# EAGLE board main1 (EAGLE 7.5.0)
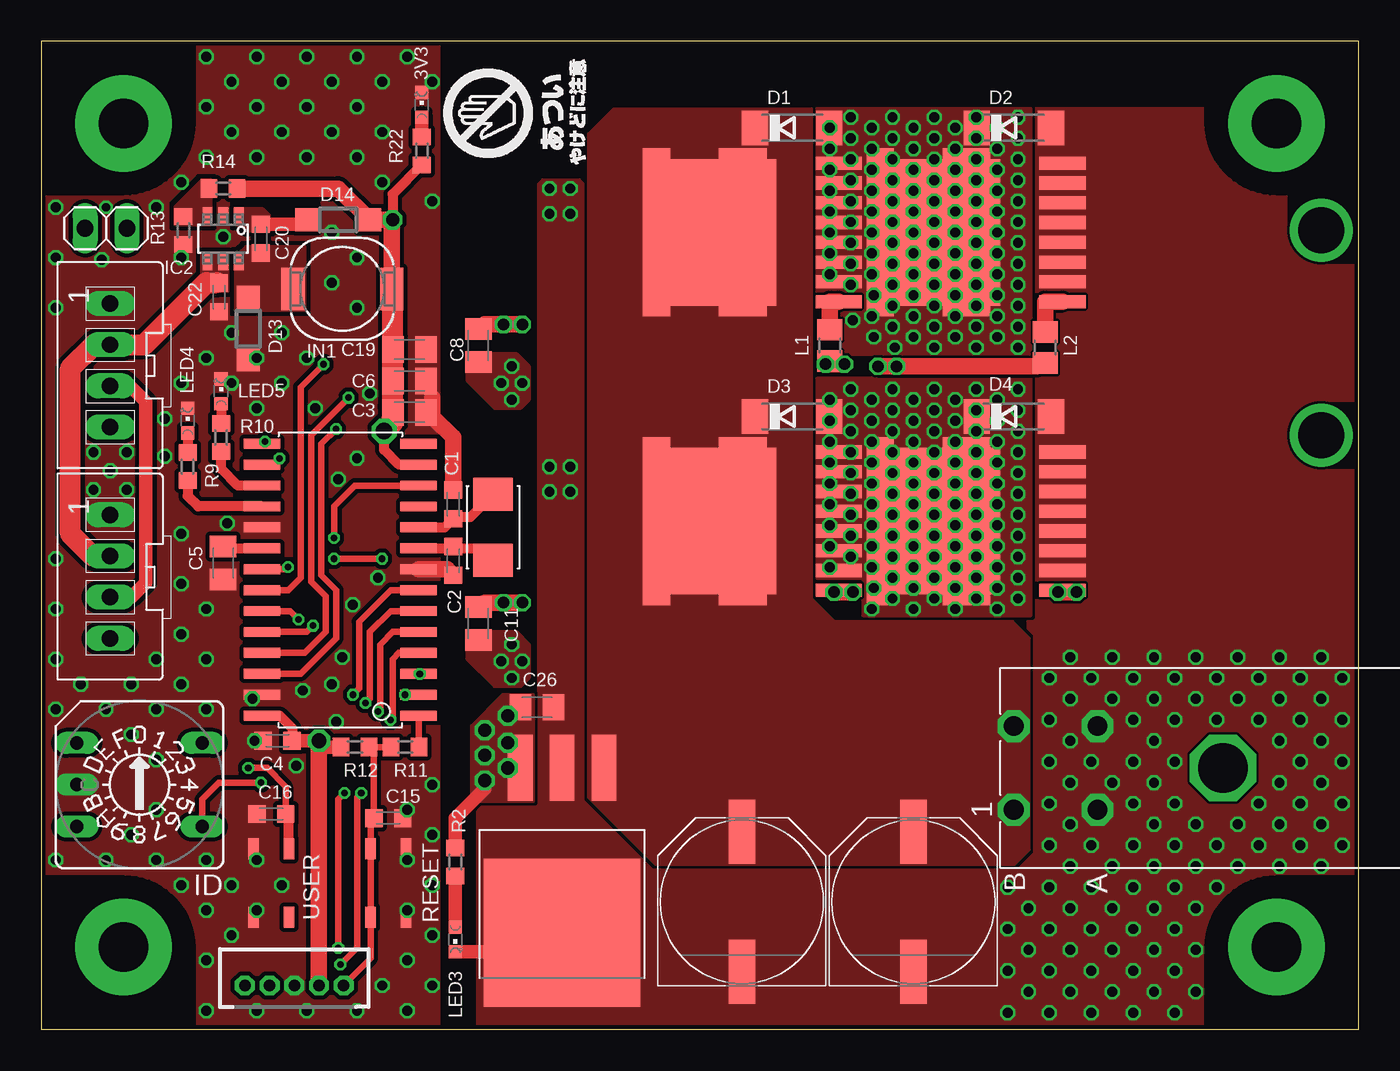
[diagram p0: board, top side]
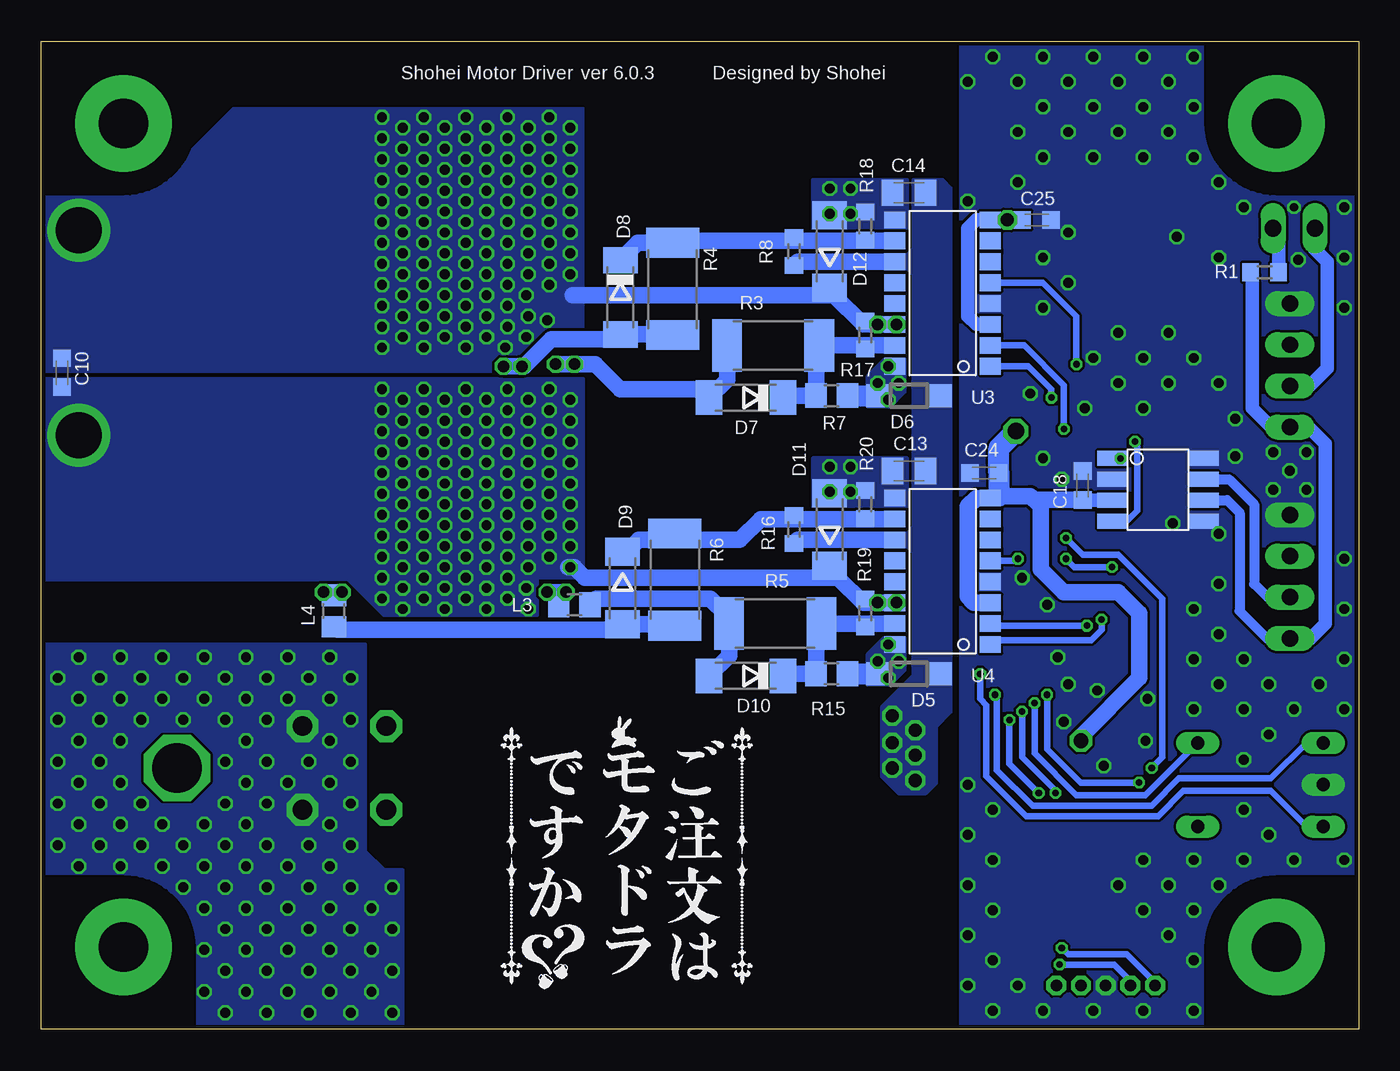
[diagram p1: board, bottom side, seen from below]

Size 80 x 60 mm. Coordinates in mm from the lower left corner, seen from the top.
Outline: 0,0 80,0 80,60 0,60 0,0
Copper layers (1*16): Top 0.035mm / dielectric 1.5mm / Bottom 0.035mm
Design rules "Elecrow_2-layer_eagle_rule": minimum track width 6mil, minimum drill 12mil, track to track 6mil, track to pad 6mil, pad to pad 6mil, via to via 6mil, smd to smd 0mil, copper to edge 10mil, drill to drill 10mil, minimum pad ring 10mil, minimum via ring 6mil, stop-mask expansion 2mil, vias tented up to drill 100mil, thermal gap 10mil
tRestrict: 6 lines
bRestrict: 1 lines

## Footprints (pad centres in the part's own frame; a part is rotated, then mirrored left to right if it is on the bottom)
CHIPLED_0603 = smd 0.8 x 0.8: A 0,-0.75; C 0,0.75
C0603K = smd 1.05 x 1.08: 1 -0.875,0; 2 0.875,0
C0805K = smd 1.3 x 1.6: 1 -1,0; 2 1,0
PANASONIC_G = smd 3.9 x 1.6: + 4.25,0; - -4.25,0
XA04 = drill 1 long: PIN1 0,0; PIN2 -2.5,0; PIN3 -5,0; PIN4 -7.5,0
SOD106-R = smd 1.6 x 2.1: A 2.25,0; C -2.25,0
SOD123 = smd 1.4 x 1.4: A 1.9,0; C -1.9,0
SOD106A-R = smd 1.7 x 2.1: A 2.2,0; C -2.2,0
3,0-PAD = drill 3 pad 5.842: B3,0 0,0
SOIC28 = smd 0.6 x 2.2: 1 -8.255,-4.75; 2 -6.985,-4.75; 3 -5.715,-4.75; 4 -4.445,-4.75; 5 -3.175,-4.75; 6 -1.905,-4.75; 7 -0.635,-4.75; 8 0.635,-4.75; 9 1.905,-4.75; 10 3.175,-4.75; 11 4.445,-4.75; 12 5.715,-4.75; 13 6.985,-4.75; 14 8.255,-4.75; 15 8.255,4.75; 16 6.985,4.75; 17 5.715,4.75; 18 4.445,4.75; 19 3.175,4.75; 20 1.905,4.75; 21 0.635,4.75; 22 -0.635,4.75; 23 -1.905,4.75; 24 -3.175,4.75; 25 -4.445,4.75; 26 -5.715,4.75; 27 -6.985,4.75; 28 -8.255,4.75
LT1616 = smd 0.6 x 1: BOOST -0.95,-1.4; FB 0.95,-1.4; GND 0,-1.4; SHDN 0.95,1.4; SW -0.95,1.4; VIN 0,1.4
TO-263-3 = smd 1.5 x 4: 1 -2.54,0; 2 0,0; 3 2.54,0 | smd 9.5 x 9: PAD 0,10
A1353HEX = drill 0.813 long: 1 3.81,-2.54; 2 -3.81,2.54; 4 3.81,2.54; 8 -3.81,-2.54; C 3.81,0
#A921CY100M = smd 1.4 x 2.6: 1 -3,0; 2 3,0
1X02 = drill 1.016 long: 1 -1.27,0; 2 1.27,0
R0805 = smd 1.3 x 1.5: 1 -0.95,0; 2 0.95,0
NX5032GA = smd 2 x 2.4: 1 -2,0; 2 2,0
R0603 = smd 1 x 1.1: 1 -0.85,0; 2 0.85,0
R2512 = smd 1.8 x 3.2: 1 -2.8,0; 2 2.8,0
SKRP = smd 1.27 x 0.635: 1 -2.075,1.075; 2 2.075,1.075; 3 -2.075,-1.075; 4 2.075,-1.075
SOIC16_N = smd 1.016 x 1.27: P$1 -4.445,-2.9; P$2 -3.175,-2.9; P$3 -1.905,-2.9; P$4 -0.635,-2.9; P$5 0.635,-2.9; P$6 1.905,-2.9; P$7 3.175,-2.9; P$8 4.445,-2.9; P$9 4.445,2.9; P$10 3.175,2.9; P$11 1.905,2.9; P$12 0.635,2.9; P$13 -0.635,2.9; P$14 -1.905,2.9; P$15 -3.175,2.9; P$16 -4.445,2.9
D-3500D04 = drill 1.2 pad 1.93 octagon: 01A -2.54,-5.08; 01B -2.54,0; 02A 2.54,-5.08; 02B 2.54,0 | drill 3 pad 4 octagon: P$1 0,-12.7
MO-299A = smd 0.8 x 2.8: 1 -4.2,-5.24; 2 -3,-5.24; 3 -1.8,-5.24; 4 -0.6,-5.24; 5 0.6,-5.24; 6 1.8,-5.24; 7 3,-5.24; 8 4.2,-5.24 | smd 8.9 x 0.6: PAD1 0,-1.16 | smd 10.2 x 2.9: PAD2 0,0.59 | smd 8.9 x 2.95: PAD3 0,3.515 | smd 10.2 x 1.65: PAD4 0,5.824
SOIC8 = smd 0.9 x 1.75: 1 -1.905,-2.8; 2 -0.635,-2.8; 3 0.635,-2.8; 4 1.905,-2.8; 5 1.905,2.8; 6 0.635,2.8; 7 -0.635,2.8; 8 -1.905,2.8
ZH05 = drill 0.7 octagon: 1 3,0; 2 1.5,0; 3 0,0; 4 -1.5,0; 5 -3,0

## Placement (x,y rotation side)
3V3  [CHIPLED_0603]  23.11,56.13 0 top
C1  22p  [C0603K]  25.02,31.88 270 top
C2  22p  [C0603K]  25.02,28.45 90 top
C3  0.1u  [C0805K]  22.35,37.47 0 top
C4  0.1u  [C0603K]  14.35,17.53 180 top
C5  4.7u  [C0805K]  11.05,28.32 270 top
C6  4.7u  [C0805K]  22.35,39.37 180 top
C8  4.7u  [C0805K]  26.54,41.53 90 top
C10  0.1u  [C0603K]  78.74,39.88 90 bottom
C11  4.7u  [C0805K]  26.54,24.64 90 top
C12  [PANASONIC_G]  52.96,7.75 90 top
C13  0.1u  [C0805K]  27.3,33.91 180 bottom
C14  0.1u  [C0805K]  27.3,50.8 180 bottom
C15  0.1u  [C0603K]  21.08,12.83 0 top
C16  0.1u  [C0603K]  13.97,13.08 0 top
C18  0.1u  [C0603K]  16.76,33.02 270 bottom
C19  4.7u  [C0805K]  22.35,41.27 180 top
C20  0.1u  [C0603K]  13.34,48.01 270 top
C21  [PANASONIC_G]  42.55,7.75 90 top
C22  4.7u  [C0603K]  10.79,44.45 90 top
C24  0.1u  [C0603K]  22.73,33.78 180 bottom
C25  0.1u  [C0603K]  19.56,49.15 0 bottom
C26  4.7u  [C0805K]  30.1,19.56 0 top
CN2  XA04-T  [XA04]  4.19,44.07 90 top
CN3  XA04-T  [XA04]  4.19,31.24 90 top
D1  SBD  [SOD106-R]  45.59,54.74 0 top
D2  SBD  [SOD106-R]  59.05,54.74 0 top
D3  SBD  [SOD106-R]  45.59,37.21 0 top
D4  SBD  [SOD106-R]  59.05,37.21 0 top
D5  [SOD123]  27.3,21.59 0 bottom
D6  [SOD123]  27.3,38.48 0 bottom
D7  [SOD106-R]  37.21,38.35 180 bottom
D8  [SOD106-R]  44.83,44.45 270 bottom
D9  [SOD106A-R]  44.7,26.8 270 bottom
D10  [SOD106-R]  37.21,21.46 180 bottom
D11  [SOD106A-R]  32.13,30.35 90 bottom
D12  [SOD106A-R]  32.13,47.24 90 bottom
D13  [SOD123]  12.57,42.55 270 top
D14  [SOD123]  18.03,49.15 0 top
H1  MOUNT-PAD-ROUND3.0  [3,0-PAD]  5,5 0 top
H2  MOUNT-PAD-ROUND3.0  [3,0-PAD]  75,5 0 top
H3  MOUNT-PAD-ROUND3.0  [3,0-PAD]  5,55 0 top
H4  MOUNT-PAD-ROUND3.0  [3,0-PAD]  75,55 0 top
IC1  DSPIC33FJ32MC302/64MC202/64MC802/128MC202/128MC802  [SOIC28]  18.16,27.3 90 top
IC2  LT1616  [LT1616]  11.05,48.01 180 top
IC3  REGULATER_MIC2940A  [TO-263-3]  31.62,15.88 180 top
ID  [A1353HEX]  5.97,14.86 180 top
IN1  #A921CY100M  [#A921CY100M]  18.29,44.96 0 top
JP3  [1X02]  3.94,48.64 180 top
L1  [R0805]  47.88,41.53 90 top
L2  [R0805]  60.96,41.4 90 top
L3  [R0805]  47.62,25.78 0 bottom
L4  [R0805]  62.23,25.4 270 bottom
LED3  [CHIPLED_0603]  25.15,5.46 180 top
LED4  [CHIPLED_0603]  8.89,36.96 0 top
LED5  [CHIPLED_0603]  10.92,38.73 0 top
Q2  CRYSTALNX5032GA  [NX5032GA]  27.43,30.48 270 top
R1  120  [R0603]  5.71,45.97 0 bottom
R2  1k  [R0603]  25.15,10.16 90 top
R3  2w 10ohm  [R2512]  35.56,41.53 180 bottom
R4  2w 10ohm  [R2512]  41.66,44.96 270 bottom
R5  2w 10ohm  [R2512]  35.43,24.64 180 bottom
R6  2w 10ohm  [R2512]  41.53,27.3 270 bottom
R7  510  [R0805]  32,38.48 0 bottom
R8  510  [R0603]  34.29,47.24 270 bottom
R9  510  [R0603]  8.89,34.16 90 top
R10  510  [R0603]  10.92,35.94 90 top
R11  330  [R0603]  22.1,17.14 0 top
R12  1k  [R0603]  19.05,17.14 180 top
R13  10k  [R0603]  8.64,48.51 90 top
R14  33k  [R0603]  11.05,51.05 180 top
R15  510  [R0805]  32,21.59 0 bottom
R16  510  [R0603]  34.29,30.35 270 bottom
R17  510  [R0603]  29.97,42.16 90 bottom
R18  510  [R0603]  29.97,48.77 90 bottom
R19  510  [R0603]  29.97,25.27 90 bottom
R20  510  [R0603]  29.97,31.88 90 bottom
R22  510  [R0603]  23.11,53.34 90 top
SW1  SWITCH_4PALPS  [SKRP]  21.08,8.89 270 top
SW2  SWITCH_4PALPS  [SKRP]  13.97,8.89 270 top
U3  [SOIC16_N]  25.27,44.7 90 bottom
U4  [SOIC16_N]  25.27,27.81 90 bottom
U$1  CN-D3500D04  [D-3500D04]  59.05,15.88 90 top
U$2  FET_NCHFDBL0065N40  [MO-299A]  43.18,48.39 90 top
U$3  FET_NCHFDBL0065N40  [MO-299A]  56.77,48.39 90 top
U$4  FET_NCHFDBL0065N40  [MO-299A]  43.18,30.86 90 top
U$5  FET_NCHFDBL0065N40  [MO-299A]  56.77,30.86 90 top
U$6  MAX3051  [SOIC8]  12.19,32.77 270 bottom
U$7  WRITE_FOR_PICT  [ZH05]  15.37,2.67 0 top
U$10  LOGO_ATSUI  [LOGO008]  33.91,52.07 90 top
U$11  LOGO_GOTIUSA2  [LOGO011]  52.32,2.29 0 bottom

## Library data of the parts
3V3 LED3-LED5 = led
C1-C6 C8 C10 C11 C13-C16 C18-C20 C22 C24-C26 = rp_c
C12 C21 = rcl
CN2 CN3 = rp_cn_xa
D1-D14 = diode
H1-H4 IC3 U3 U4 U$10 U$11 = Shohei
IC1 Q2 SW1 SW2 U$1-U$7 = Syohei
IC2 = LT1616
ID = switch-dil; OC_FARNELL: unknown; OC_NEWARK: unknown
IN1 = inductor
JP3 = pinhead-2
L1-L4 R1-R20 R22 = rp_r

## Nets
0V: C12.- C13.2 C14.2 C21.- C26.2 D2.A D4.A D11.A D12.A IC3.2 IC3.PAD LED3.C R18.2 R20.2 U3.P$9 U4.P$9 U$1.01A U$1.02A U$3.2 U$3.3 U$3.4 U$3.5 U$3.6 U$3.7 U$3.8 U$5.2 U$5.3 U$5.4 U$5.5 U$5.6 U$5.7 U$5.8
3.3V: C3.1 C4.1 C6.2 C18.2 C19.2 C24.1 C25.1 D14.A IC1.13 IC1.28 IN1.2 R12.2 R14.1 R22.1 U3.P$3 U3.P$8 U4.P$3 U4.P$8 U$6.3 U$7.2
+10V: C22.2 CN2.PIN2 CN3.PIN2 IC2.SHDN IC2.VIN
BOOTA: C8.1 D6.C R7.2 U3.P$16
BOOTB: C11.1 D5.C R15.2 U4.P$16
CANH: CN2.PIN3 CN3.PIN3 JP3.2 U$6.7
CANL: CN2.PIN4 CN3.PIN4 R1.1 U$6.6
CRXD: IC1.15 U$6.4
CTXD: IC1.16 U$6.1
DGND: 3V3.C C1.1 C2.1 C3.2 C4.2 C5.2 C6.1 C15.2 C16.1 C18.1 C19.1 C22.1 C24.2 C25.2 CN2.PIN1 CN3.PIN1 D13.A IC1.8 IC1.19 IC1.27 IC2.GND ID.C LED4.C LED5.C R13.1 SW1.1 SW1.2 SW2.3 SW2.4 U3.P$4 U4.P$4 U$6.2 U$6.5 U$6.8 U$7.3
DIS_A: IC1.22 U3.P$5
DIS_B: IC1.21 U4.P$5
HA: D7.C R3.1 R7.1 R17.1 U3.P$15
HB: D10.C R5.1 R15.1 R19.1 U4.P$15
LA: D8.C R4.1 R8.1 R18.1 U3.P$10
LB: D9.C R6.1 R16.1 R20.1 U4.P$10
LED0: IC1.18 R9.1
LED1: IC1.17 R10.1
MCLR: C15.1 R11.1 R12.1 SW1.3 SW1.4 U$7.1
N$1: C2.2 IC1.9 Q2.2
N$2: C1.2 IC1.10 Q2.1
N$3: C5.1 IC1.20
N$4: JP3.1 R1.2
N$5: LED3.A R2.1
N$6: LED4.A R9.2
N$7: LED5.A R10.2
N$8: L1.2 U$2.1
N$9: D8.A L2.1 R4.2
N$12: L2.2 U$3.1
N$13: D9.A L4.2 R6.2
N$14: L4.1 U$5.1
N$15: D10.A L3.2 R5.2
N$16: L3.1 U$4.1
N$17: IC1.1 R11.2
N$22: 3V3.A R22.2
N$24: D7.A L1.1 R3.2
N$43: C20.2 D13.C IC2.SW IN1.1
N$44: IC2.FB R13.2 R14.2
N$46: C20.1 D14.C IC2.BOOST
OUT+: C8.2 C10.2 D1.A D2.C D12.C R17.2 U3.P$14 U$2.2 U$2.3 U$2.4 U$2.5 U$2.6 U$2.7 U$2.8 U$3.PAD1 U$3.PAD2 U$3.PAD3 U$3.PAD4
OUT-: C10.1 C11.2 D3.A D4.C D11.C R19.2 U4.P$14 U$4.2 U$4.3 U$4.4 U$4.5 U$4.6 U$4.7 U$4.8 U$5.PAD1 U$5.PAD2 U$5.PAD3 U$5.PAD4
PGEC: IC1.5 U$7.5
PGED: IC1.4 U$7.4
PWMHA: IC1.25 U3.P$1
PWMHB: IC1.23 U4.P$1
PWMLA: IC1.26 U3.P$2
PWMLB: IC1.24 U4.P$2
SW: C16.2 IC1.12 SW2.1
SW0: IC1.7 ID.2
SW1: IC1.6 ID.8
SW2: IC1.3 ID.4
SW3: IC1.2 ID.1
VCC_1: C13.1 C14.1 C26.1 D5.A D6.A IC3.3 R2.2 R8.2 R16.2 U3.P$11 U4.P$11
VDD: C12.+ C21.+ D1.C D3.C IC3.1 U$1.01B U$1.02B U$2.PAD1 U$2.PAD2 U$2.PAD3 U$2.PAD4 U$4.PAD1 U$4.PAD2 U$4.PAD3 U$4.PAD4

## Tracks (layer width: path | path; a pad name or v marks a point on that pad's centre or on a via)
0V  (via drill 0.6)
  Top 0.813: LED3.C 27.94,4.71 27.94,3.43
  other vias: 30.86,32.64 32.13,32.64 30.86,34.16 32.13,34.16 30.86,49.53 32.13,49.53 32.13,51.05 30.86,51.05 68.83,1.02 66.29,1.02 63.75,1.02 61.21,1.02 58.67,1.02 59.94,2.29 62.48,2.29 65.02,2.29 67.56,2.29 70.1,2.29 68.83,3.56 66.29,3.56 63.75,3.56 61.21,3.56 58.67,3.56 59.94,4.83 62.48,4.83 65.02,4.83 67.56,4.83 70.1,4.83 68.83,6.1 66.29,6.1 63.75,6.1 61.21,6.1 58.67,6.1 59.94,7.37 62.48,7.37 65.02,7.37 67.56,7.37 70.1,7.37 68.83,8.64 66.29,8.64 63.75,8.64 61.21,8.64 58.67,8.64 62.48,9.91 65.02,9.91 67.56,9.91 70.1,9.91 71.37,8.64 77.72,9.91 75.18,9.91 72.64,9.91 71.37,11.18 73.91,11.18 76.45,11.18 78.99,11.18 67.56,22.61 67.56,20.07 67.56,17.53 67.56,14.99 67.56,12.45 66.29,11.18 66.29,13.72 66.29,16.26 66.29,18.8 66.29,21.34 65.02,22.61 65.02,20.07 65.02,14.99 63.75,11.18 63.75,16.26 63.75,21.34 62.48,22.61 62.48,20.07 62.48,17.53 62.48,14.99 62.48,12.45 70.1,22.61 70.1,20.07 70.1,12.45 68.83,11.18 68.83,13.72 68.83,16.26 68.83,18.8 68.83,21.34 73.91,13.72 76.45,13.72 78.99,13.72 77.72,12.45 75.18,12.45 72.64,12.45 72.64,22.61 75.18,22.61 77.72,22.61 77.72,14.99 75.18,14.99 76.45,16.26 78.99,16.26 77.72,17.53 75.18,17.53 71.37,18.8 73.91,18.8 76.45,18.8 78.99,18.8 77.72,20.07 75.18,20.07 72.64,20.07 71.37,21.34 73.91,21.34 76.45,21.34 78.99,21.34 61.21,13.72 61.21,11.18 61.21,16.26 61.21,18.8 61.21,21.34
  pour Bottom (rank 6, no thermals): 27.43,51.56 33.15,51.56 33.15,48.64 27.43,48.64
  pour Bottom (rank 6, no thermals): 27.43,34.67 33.15,34.67 33.15,31.75 27.43,31.75
  pour Bottom (rank 6, no thermals): 58.04,9.65 59.18,9.65 60.33,10.79 60.33,23.37 80.01,23.37 80.01,0 58.04,0
  pour Top (rank 6, no thermals): 59.94,11.68 26.54,11.68 26.54,0 80.01,0 80.01,55.88 60.39,55.88 60.39,24.77 59.94,24.77
  pour Top (rank 6, no thermals): 26.54,0 26.54,13.84 29.97,13.84 30.23,14.1 30.23,51.31 30.48,51.56 32.64,51.56 32.89,51.31 32.89,14.86 37.47,10.29 37.47,0
3.3V  (via drill 0.8, 0.9, 1)
  Top 0.406: 16.91,16.6 16.87,17.14 | C3.1 21.32,37.82 21.32,37.21
  Top 0.61: IC1.28 14.48,19.05 15.24,18.29 15.24,17.67 C4.1 | IC1.13 21.72,34.29 20.83,35.18 v20.83,36.32 | R22.1 21.34,50.71 v21.34,49.15
  Top 0.813: 16.91,16.6 v16.87,17.53 C4.1 | 16.87,17.14 R12.2
  Top 1.016: U$7.2 16.87,17.14 v16.87,17.53 | R14.1 18.03,51.05 D14.A v21.34,49.15 21.29,49.1 IN1.2
  Top 1.27: 21.32,37.21 21.32,36.81 v20.83,36.32 | 21.32,37.82 21.35,37.82 C6.2 C19.2 21.35,44.89 IN1.2
  Bottom 0.813: C25.1 v21.34,49.15 U3.P$8 23.24,49.15 23.75,48.64 23.75,43.31 23.24,42.8 U3.P$3 | U$6.3 16.5,32.13 C18.2 | U4.P$8 21.98,32.26 21.86,32.38
  Bottom 1.016: v16.87,17.53 16.87,17.8 13.34,21.34 13.34,25.27 14.61,26.54 17.91,26.54 19.3,27.94 19.3,31.75 19.7,32.15 | U4.P$3 23.37,25.91 23.75,26.29 23.75,31.75 23.24,32.26 U4.P$8 | 21.86,32.38 19.94,32.38 19.7,32.15 | C18.2 19.7,32.15
  Bottom 1.27: v20.83,36.32 21.86,35.29 C24.1 21.86,32.38
+10V
  Top 1.27: CN3.PIN2 3.13,28.74 1.78,30.1 1.78,40.13 3.21,41.57 CN2.PIN2 6.26,41.57 10.03,45.34 10.67,45.34
  pour Top (no thermals): 11.3,44.83 9.78,44.83 9.78,47.12 11.3,47.12
BOOTA  (via drill 0.6)
  Bottom 1.27: R7.2 D6.C
  other vias: 28.57,38.23 27.94,39.24 29.21,39.24 28.57,40.26
  pour Top (rank 4, no thermals): 25.91,41.02 28.83,41.02 29.59,40.26 29.59,38.23 29.08,37.72 27.56,37.72 25.91,39.37
  pour Bottom (rank 4, no thermals): 27.56,40.64 28.83,40.64 29.84,39.62 29.84,37.85 28.45,37.85 27.56,38.73
BOOTB  (via drill 0.6)
  Bottom 1.27: R15.2 D5.C
  other vias: 28.57,23.37 29.21,22.35 28.57,21.34 27.94,22.35
  pour Bottom (rank 4, no thermals): 27.56,23.75 28.83,23.75 29.84,22.73 29.84,20.95 28.45,20.95 27.56,21.84
  pour Top (rank 4, no thermals): 25.91,24.13 28.83,24.13 29.59,23.37 29.59,21.34 29.08,20.83 27.56,20.83 25.91,22.48
CANH
  Top 0.813: CN2.PIN3 5.38,39.07 6.35,38.1 6.35,27.13 5.46,26.24 CN3.PIN3
  Bottom 0.61: U$6.7 7.87,33.4 6.35,31.88 6.35,27.05 5.54,26.24 CN3.PIN3
  Bottom 0.813: JP3.2 2.67,47.37 1.91,46.61 1.91,40.13 2.97,39.07 CN2.PIN3
CANL
  Bottom 0.61: U$6.6 8,32.13 7.24,31.37 7.24,25.4 5.58,23.74 CN3.PIN4
  Bottom 0.813: CN3.PIN4 2.92,23.75 2.03,24.64 2.03,35.56 3.04,36.57 CN2.PIN4 5.33,36.57 6.48,37.72 6.48,45.76 R1.1
CRXD  (via drill 0.4)
  Top 0.406: IC1.15 13.41,35.51 v13.59,35.69
  Bottom 0.406: v13.59,35.69 13.46,35.56 13.46,31.5 14.1,30.86 U$6.4
CTXD  (via drill 0.4)
  Top 0.406: IC1.16 14.1,34.29 v14.48,34.67
  Bottom 0.406: v14.48,34.67 U$6.1
DGND  (via drill 0.5, 0.6)
  Top 1.016: C1.1 25.02,35.94 23.75,37.21 23.75,38.35 | C2.1 24.65,27.94 IC1.8
  other vias: 10.03,59.05 13.08,59.05 16.13,59.05 19.18,59.05 22.23,59.05 10.03,56.01 10.03,52.96 11.05,48.13 8.51,51.44 6.99,49.91 3.94,49.91 0.89,49.91 0.89,46.86 0.89,43.81 11.56,57.53 14.61,57.53 17.65,57.53 20.7,57.53 23.75,57.53 11.56,54.48 13.08,56.01 16.13,56.01 19.18,56.01 14.61,54.48 17.65,54.48 20.7,54.48 13.08,52.96 16.13,52.96 19.18,52.96 20.7,51.44 23.75,50.29 3.68,46.74 4.19,33.91 3.17,35.05 5.21,35.05 3.17,32.77 5.21,32.77 0.89,28.57 0.89,25.53 0.89,22.48 0.89,19.43 0.89,10.29 3.94,10.29 6.99,10.29 8.51,8.76 10.03,10.29 10.03,7.24 10.03,4.19 10.03,1.14 13.08,1.14 16.13,1.14 19.18,1.14 22.23,1.14 23.75,2.67 23.75,5.71 23.75,8.76 23.75,11.81 23.75,14.86 22.23,13.34 22.23,10.29 22.23,7.24 22.23,4.19 20.7,2.67 11.56,5.71 11.56,8.76 13.08,10.29 13.08,7.24 14.61,8.76 3.94,19.43 6.99,19.43 10.03,19.43 2.41,20.95 5.46,20.95 8.51,20.95 10.03,22.48 6.99,22.48 8.51,24 10.03,25.53 8.51,27.05 8.51,30.1 8.51,39.24 10.03,40.77 11.56,39.24 13.08,40.77 14.61,39.24 13.08,37.72 16.13,40.77 14.61,42.29 11.56,42.29 8.51,46.86 19.18,43.81 17.65,45.34 17.65,48.39 19.18,46.86 19.18,34.67 17.65,20.95 6.99,16.38 5.46,17.91 6.99,13.34 5.46,11.81 11.3,30.73 7.49,34.8 7.49,37.08 18.03,33.4 20.45,27.43 18.92,25.78 18.29,22.61 17.91,18.67 12.83,20.07 15.49,16 12.95,17.53 15.88,20.57 19.94,38.61 16.64,37.72
  pour Bottom (rank 6, no thermals): 0,0 24.13,0 24.13,19.94 24.13,60.07 0,60.07
  pour Top (isolate 0.254, rank 6, no thermals): 0,0 24.13,0 24.13,2.29 24.13,60.07 0,60.07
DIS_A  (via drill 0.4)
  Top 0.406: IC1.22 14.99,26.67 15.75,27.43 15.75,38.99 v17.14,40.39
  Bottom 0.406: v17.14,40.39 17.14,43.31 19.18,45.34 U3.P$5
DIS_B  (via drill 0.4)
  Top 0.406: v17.78,28.57 v20.7,28.57 | IC1.21 14.86,27.94 v14.99,28.07
  Bottom 0.406: v14.99,28.07 17.27,28.07 v17.78,28.57 | v20.7,28.57 20.83,28.45 U4.P$5
HA
  Bottom 0.406: R17.1 29.84,41.31 29.84,41.53
  Bottom 1.016: U3.P$15 29.84,41.53 R3.1 32.95,41.34 R7.1 34.83,38.48 D7.C
HB
  Bottom 0.406: R19.1 29.84,24.42 29.84,24.64
  Bottom 1.016: U4.P$15 29.84,24.64 R5.1 32.95,24.32 R15.1 34.83,21.59 D10.C
LA
  Bottom 0.406: R18.1 29.97,47.88
  Bottom 1.016: U3.P$10 29.97,47.88 34.16,47.88 | R8.1 34.16,47.88 | 34.16,47.88 41.53,47.88 R4.1 43.77,47.76 D8.C
LB
  Bottom 0.406: R20.1 29.84,31.03 29.84,30.99
  Bottom 1.016: U4.P$10 29.84,30.99 34.16,30.99 | 34.16,30.99 R16.1 | 34.16,30.99 36.32,30.99 37.59,29.72 41.14,29.72 R6.1 | R6.1 | R6.1 41.53,29.72 43.73,29.72 44.45,29 D9.C
LED0
  Top 0.61: IC1.18 9.53,31.75 8.89,32.38 R9.1
LED1
  Top 0.61: IC1.17 11.94,33.02 10.92,34.04 R10.1
MCLR
  Top 0.406: R11.1 R12.1 20.21,16.84 C15.1 20.01,12.63 SW1.3 SW1.4 20.01,4.31 U$7.1
N$1
  Top 0.61: IC1.9 24.78,29.21 C2.2 25.26,29.21 26.92,29.21 27.43,28.7 Q2.2
N$2
  Top 0.61: IC1.10 24.5,30.48 C1.2 25.13,31.11 26.07,31.11 Q2.1
N$3
  Top 0.61: C5.1 11.16,29.21 IC1.20
N$4
  Bottom 0.813: R1.2 4.87,48.3 JP3.1
N$5
  Top 0.813: R2.1 LED3.A
N$6
  Top 0.61: LED4.A R9.2
N$7
  Top 0.61: LED5.A R10.2
N$8
  Top 1.016: L1.2 47.88,44.19 U$2.1
N$9  (via drill 0.7)
  Top 1.016: v50.8,40.26 v51.94,40.26 60.45,40.26 60.65,40.45 L2.1
  Bottom 1.016: v51.94,40.26 v50.8,40.26 50.67,40.26 49.02,41.91 45.47,41.91 45.18,42.2 D8.A 41.7,42.2 R4.2
N$11
  cutout Top: 80,0 70.75,0 70.75,5 arc-90 75,9.25 80,9.25
  cutout Top: 80,60 80,50.75 75,50.75 arc-90 70.75,55 70.75,60
  cutout Bottom: 80,60 70.75,60 70.75,55 arc90 75,50.75 80,50.75
  cutout Bottom: 80,0 80,9.25 75,9.25 arc90 70.75,5 70.75,0
  cutout Bottom: 0,0 9.25,0 9.25,5 arc90 5,9.25 0,9.25
  cutout Top: 0,0 0,9.25 5,9.25 arc-90 9.25,5 9.25,0
  cutout Top: 0,60 9.25,60 9.25,55 arc-90 5,50.75 0,50.75
  cutout Bottom: 0,60 0,50.75 5,50.75 arc90 9.25,55 9.25,60
N$12
  Top 1.016: L2.2 60.96,43.81 60.95,44.19 U$3.1
N$13
  Bottom 1.016: R6.2 41.62,24.6 D9.A 45.04,24.26 62.04,24.26 L4.2
N$14  (via drill 0.7)
  Top 0.305: v61.72,26.54 62.01,26.54 U$5.1
  Top 1.016: v61.72,26.54 v62.87,26.54
  Bottom 1.016: v62.87,26.54 v61.72,26.54 | 62.67,26.54 v61.72,26.54 | L4.1 62.23,26.54 v61.72,26.54
N$15
  Bottom 1.016: D10.A 38.23,22.69 R5.2 38.48,24.89 38.48,25.27 39.37,26.16 46.29,26.16 L3.2
N$16  (via drill 0.7)
  Top 0.254: 48.55,26.54 U$4.1
  Top 1.016: v49.28,26.54 48.55,26.54 v48.13,26.54
  Bottom 1.016: v49.28,26.54 v48.13,26.54 48.83,26.54 L3.1
N$17
  Top 0.406: R11.2 22.91,17.18 IC1.1
N$22
  Top 0.813: 3V3.A R22.2
N$24  (via drill 0.7)
  Top 1.016: L1.1 47.88,40.39 | 47.88,40.39 v48.77,40.39 | v47.62,40.39 47.88,40.39
  Bottom 1.016: v48.77,40.39 v47.62,40.39 46.35,40.39 44.83,38.86 40.13,38.86 39.62,38.35 D7.A 38.36,39.45 R3.2
N$43
  pour Top (rank 2, no thermals): 11.81,47.12 11.81,43.69 16,43.69 16,47.5 12.45,47.5 12.06,47.12
N$44
  pour Top (no thermals): 8.13,48.9 10.29,48.9 10.29,51.56 9.78,51.56 8.13,49.91
N$46
  Top 0.813: D14.C 16.12,48.88 C20.1
  pour Top (no thermals): 11.81,48.9 12.19,48.9 12.57,48.51 13.84,48.51 13.84,49.4 13.46,49.78 11.81,49.78
OUT+  (via drill 0.6, 0.7, 2.8)
  Top 1.016: v29.21,42.8 v28.07,42.8 26.92,42.8 26.65,42.53 C8.2
  Bottom 0.406: 30.1,42.8 29.97,42.8 R17.2
  Bottom 1.016: U3.P$14 v29.21,42.8 30.1,42.8 31.88,44.58 32.6,44.58 | D12.C 32.6,44.58 | 32.6,44.58 47.73,44.58
  other vias: 55.5,43.31 55.5,45.85 52.96,52.2 52.96,50.93 52.96,49.66 55.5,42.04 52.96,48.39 52.96,47.12 52.96,45.85 55.5,54.74 56.77,51.56 56.77,47.75 55.5,50.93 55.5,49.66 56.77,41.4 56.77,42.67 58.04,43.31 56.77,46.48 55.5,52.2 56.77,52.83 56.77,55.37 56.77,43.94 58.04,42.04 56.77,49.02 56.77,50.29 55.5,47.12 56.77,54.1 55.5,53.47 52.96,44.58 58.04,53.47 56.77,45.21 58.04,47.12 58.04,45.85 59.31,41.4 58.04,44.58 55.5,44.58 59.31,43.94 59.31,42.67 59.31,45.21 58.04,48.39 58.04,49.66 58.04,50.93 58.04,52.2 58.04,54.74 59.31,55.37 59.31,54.1 59.31,52.83 59.31,51.56 59.31,50.29 59.31,49.02 59.31,47.75 59.31,46.48 55.5,48.39 77.72,48.51 54.23,41.4 54.23,42.67 54.23,43.94 54.23,45.21 54.23,46.48 54.23,47.75 54.23,49.02 54.23,50.29 54.23,51.56 54.23,52.83 54.23,54.1 54.23,55.37 52.96,54.74 52.96,53.47 52.96,43.31 52.96,42.04 51.69,42.67 51.69,43.94 51.69,45.21 51.69,46.48 51.69,47.75 51.69,49.02 51.69,50.29 51.69,51.56 51.69,52.83 51.69,54.1 51.69,55.37 50.42,54.74 50.42,53.47 49.15,54.1 49.15,55.37 47.88,54.74 49.15,52.83 50.42,52.2 47.88,53.47 50.42,50.93 49.15,51.56 47.88,52.2 50.42,49.66 50.42,48.39 50.42,47.12 50.42,45.85 50.55,44.58 50.42,43.31 50.55,42.04 51.82,41.4 49.28,43.05 49.15,50.29 49.15,49.02 49.15,47.75 49.15,46.48 49.15,45.21 47.88,45.85 47.88,47.12 47.88,48.39 47.88,49.66 47.88,50.93
  pour Top (no thermals): 47.12,55.88 47.12,41.02 60.07,41.02 60.07,55.88
  pour Bottom (no thermals): 47.12,55.88 68.33,55.88 72.64,51.56 80.01,51.56 80.01,40.01 47.12,40.01
OUT-  (via drill 0.6, 0.7, 2.8)
  Top 1.016: v29.21,25.91 26.92,25.91 26.65,25.64 C11.2
  Bottom 0.406: R19.2 29.97,25.91
  Bottom 1.016: v28.07,25.91 U4.P$14 v29.21,25.91 29.97,25.91 30.1,25.91 31.62,27.43 32.77,27.43 | D11.C 32.09,27.81 32.38,27.81 32.77,27.43 | 32.77,27.43 46.99,27.43 47.62,28.07 48.01,28.07
  other vias: 47.88,31.88 54.23,31.24 54.23,32.51 54.23,35.05 47.88,33.15 47.88,34.42 47.88,36.96 47.88,35.69 54.23,36.32 55.5,25.53 54.23,38.86 54.23,28.7 54.23,29.97 55.5,29.34 55.5,28.07 55.5,30.61 55.5,26.8 55.5,34.42 55.5,35.69 55.5,36.96 55.5,33.15 55.5,31.88 56.77,36.32 56.77,33.78 47.88,38.23 54.23,37.59 56.77,35.05 54.23,33.78 55.5,38.23 56.77,32.51 56.77,31.24 56.77,29.97 56.77,28.7 58.04,38.23 59.31,37.59 59.31,38.86 58.04,36.96 58.04,35.69 58.04,34.42 58.04,33.15 59.31,27.43 59.31,26.16 59.31,36.32 59.31,35.05 59.31,33.78 59.31,32.51 59.31,31.24 59.31,29.97 59.31,28.7 58.04,31.88 58.04,30.61 58.04,29.34 58.04,28.07 58.04,26.8 58.04,25.53 56.77,26.16 56.77,27.43 56.77,37.59 56.77,38.86 54.23,27.43 54.23,26.16 52.96,25.53 52.96,26.8 52.96,28.07 52.96,29.34 52.96,30.61 52.96,31.88 52.96,33.15 52.96,34.42 52.96,35.69 52.96,36.96 52.96,38.23 51.69,37.59 51.69,38.86 51.69,36.32 51.69,35.05 51.69,33.78 51.69,32.51 51.69,31.24 51.69,29.97 51.69,28.7 51.69,27.43 51.69,26.16 50.42,38.23 50.42,36.96 50.42,35.69 50.42,34.42 50.42,33.15 50.42,31.88 50.42,30.61 50.42,29.34 50.42,28.07 50.42,25.53 49.15,28.7 49.15,29.97 49.15,31.24 49.15,32.51 49.15,33.78 49.15,35.05 49.15,36.32 49.15,37.59 49.15,38.86 47.88,30.61 47.88,29.34 47.88,28.07 77.72,36.07 50.55,26.8
  pour Top (no thermals): 47.12,27.43 49.91,27.43 49.91,25.15 60.07,25.15 60.07,39.5 47.12,39.5
  pour Bottom (rank 2, no thermals): 47.12,27.43 49.91,27.43 49.91,25.15 59.18,25.15 61.34,27.3 80.01,27.3 80.01,39.5 47.12,39.5
PGEC  (via drill 0.4)
  Top 0.406: IC1.5 21.34,24.13 20.57,23.37 20.57,19.43 v20.45,19.3 | v18.03,4.95 18.03,13.97 v18.41,14.35
  Bottom 0.406: v20.45,19.3 20.45,16.51 18.41,14.48 v18.41,14.35 | U$7.5 12.37,2.84 14.1,4.57 17.65,4.57 v18.03,4.95
PGED  (via drill 0.4)
  Top 0.406: IC1.4 21.72,22.86 21.34,22.48 21.34,18.92 v21.21,18.8 | v19.43,14.35 19.18,14.1 19.18,4.95 v18.16,3.94
  Bottom 0.406: v21.21,18.8 21.21,16.13 v19.43,14.35 | U$7.4 13.87,2.94 14.86,3.94 v18.16,3.94
PWMHA  (via drill 0.4)
  Top 0.406: v18.67,38.35 16.38,36.07 16.38,27.18 17.27,26.29 17.27,24.13 16,22.86 IC1.25
  Bottom 0.406: U3.P$1 20.07,40.26 18.67,38.86 v18.67,38.35
PWMHB  (via drill 0.4)
  Top 0.406: IC1.23 15.11,25.4 v15.62,24.89
  Bottom 0.406: v15.62,24.89 15.62,24.26 16.26,23.62 21.97,23.62 22.23,23.37 U4.P$1
PWMLA  (via drill 0.4)
  Top 0.406: v17.91,36.45 17.02,35.56 17.02,27.56 17.91,26.67 17.91,23.75 15.75,21.59 IC1.26
  Bottom 0.406: v17.91,36.45 17.91,39.12 20.32,41.53 U3.P$2
PWMLB  (via drill 0.4)
  Top 0.406: IC1.24 16.13,24.13 v16.51,24.51
  Bottom 0.406: v16.51,24.51 22.25,24.51 U4.P$2
SW  (via drill 0.4)
  Top 0.406: IC1.12 19.05,33.02 17.78,31.75 v17.78,29.84 | v12.57,15.88 13.72,15.88 14.85,14.75 C16.2
  Top 0.61: SW2.1 15.04,12.88 C16.2
  Bottom 0.406: v17.78,29.84 16.76,28.83 14.61,28.83 11.94,26.16 11.94,16.51 v12.57,15.88
SW0  (via drill 0.4)
  Top 0.406: IC1.7 21.21,26.67 19.3,24.77 19.3,20.7 v18.92,20.32 | v13.34,14.99 10.79,14.99 9.78,13.97 ID.2
  Bottom 0.406: v18.92,20.32 18.92,17.02 16.89,14.99 v13.34,14.99
SW1  (via drill 0.4)
  Top 0.406: IC1.6 21.21,25.4 19.94,24.13 19.94,20.07 v19.68,19.81
  Bottom 0.406: v19.68,19.81 19.68,16.76 17.14,14.22 12.95,14.22 ID.8
SW2  (via drill 0.4)
  Top 0.406: 22.1,21.59 IC1.3 v22.99,21.59
  Bottom 0.406: v22.99,21.59 22.99,20.07 22.61,19.68 22.61,15.37 20.19,12.95 12.19,12.95 10.67,14.48 5.33,14.48 3.17,12.32 ID.4
SW3  (via drill 0.4)
  Top 0.406: IC1.2 v22.1,20.32
  Bottom 0.406: v22.1,20.32 21.97,20.19 21.97,15.75 19.81,13.59 12.57,13.59 10.92,15.24 5.33,15.24 3.17,17.4 ID.1
VCC_1  (via drill 0.8)
  Top 0.813: R2.2 25.15,12.83 26.92,14.61 v26.92,15.11
  Bottom 1.016: R8.2 34.08,46.61 U3.P$11 | R16.2 34.08,29.72 U4.P$11
  other vias: 28.32,19.05 26.92,16.64 26.92,18.16 28.32,15.88 28.32,17.4
  pour Top (rank 2, no thermals): 29.84,13.84 26.16,13.84 26.16,18.41 28.07,20.32 29.84,20.32
  pour Bottom (rank 4, no thermals): 28.96,19.56 28.96,15.37 27.94,14.35 26.29,14.35 25.65,14.99 25.65,18.41 24.77,19.3 24.77,51.05 25.27,51.56 27.05,51.56 27.05,47.37 27.43,46.99 28.83,46.99 28.83,46.23 27.43,46.23 27.05,45.85 27.05,30.48 27.43,30.1 28.83,30.1 28.83,29.34 27.43,29.34 27.05,28.96 27.05,21.46
VDD
  pour Top (rank 2, no thermals): 59.05,10.03 37.34,10.03 33.27,14.1 33.27,54.36 34.8,55.88 46.74,55.88 46.74,26.16 48.13,24.77 58.93,24.77 59.94,23.75 59.94,10.92

## Text on the board
tPlace: USER | RESET
bPlace: Designed by Shohei | ver 6.0.3 | Shohei Motor Driver